# Altium PCB GIC_G1.PcbDoc
Units mm, origin at the board's own origin, x right, y up, seen from the top; angles counter-clockwise.
Board outline 50 x 50 mm, 2 copper layers (Top Layer, Bottom Layer); 17 components, 10 nets, 46 pads, 0 vias.
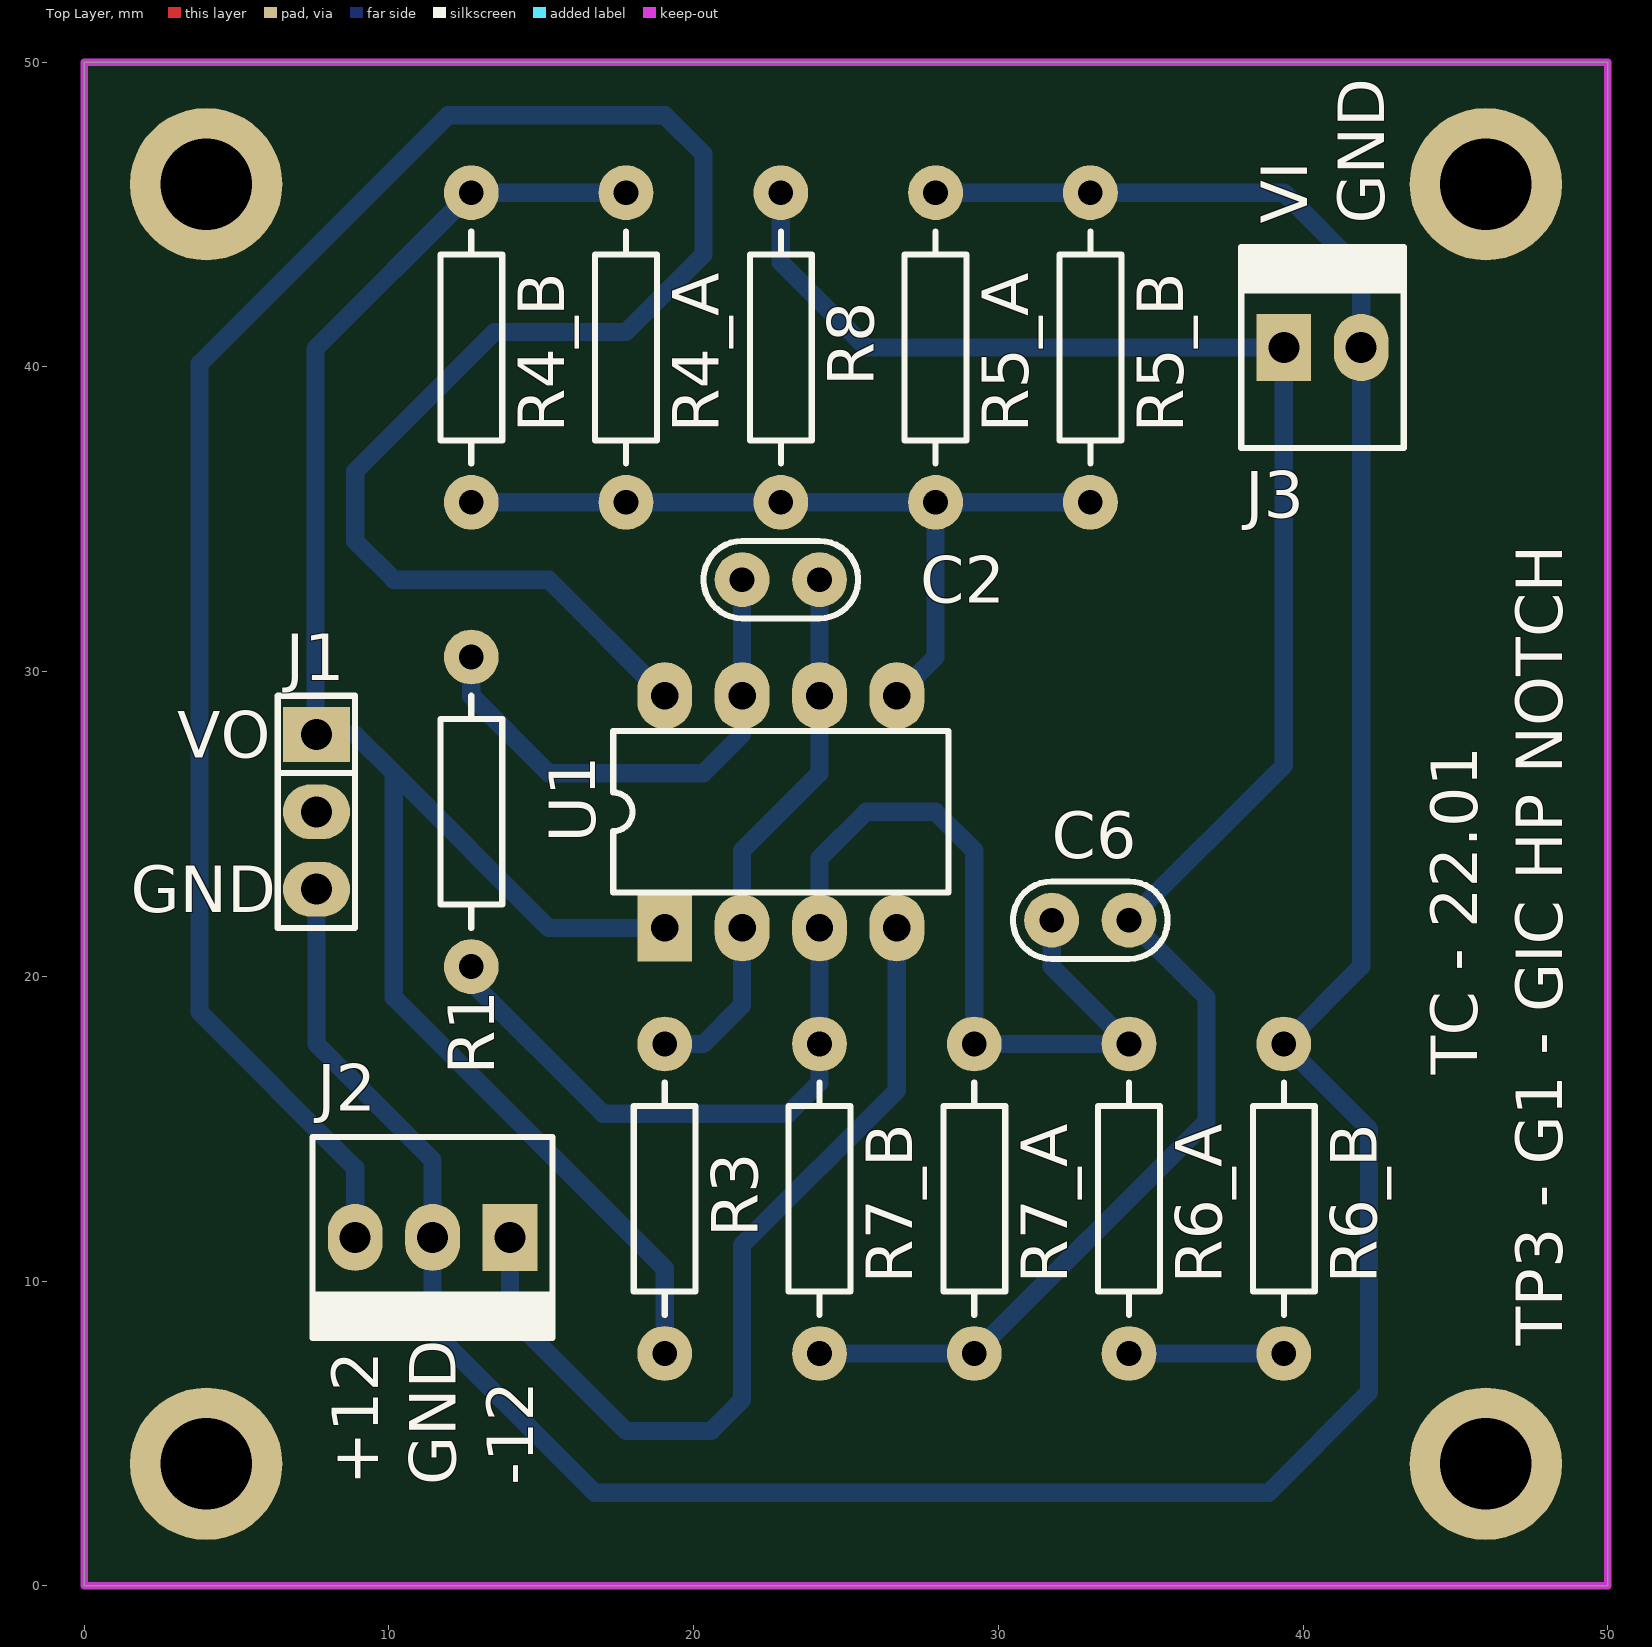
[diagram p0: Top Layer view]
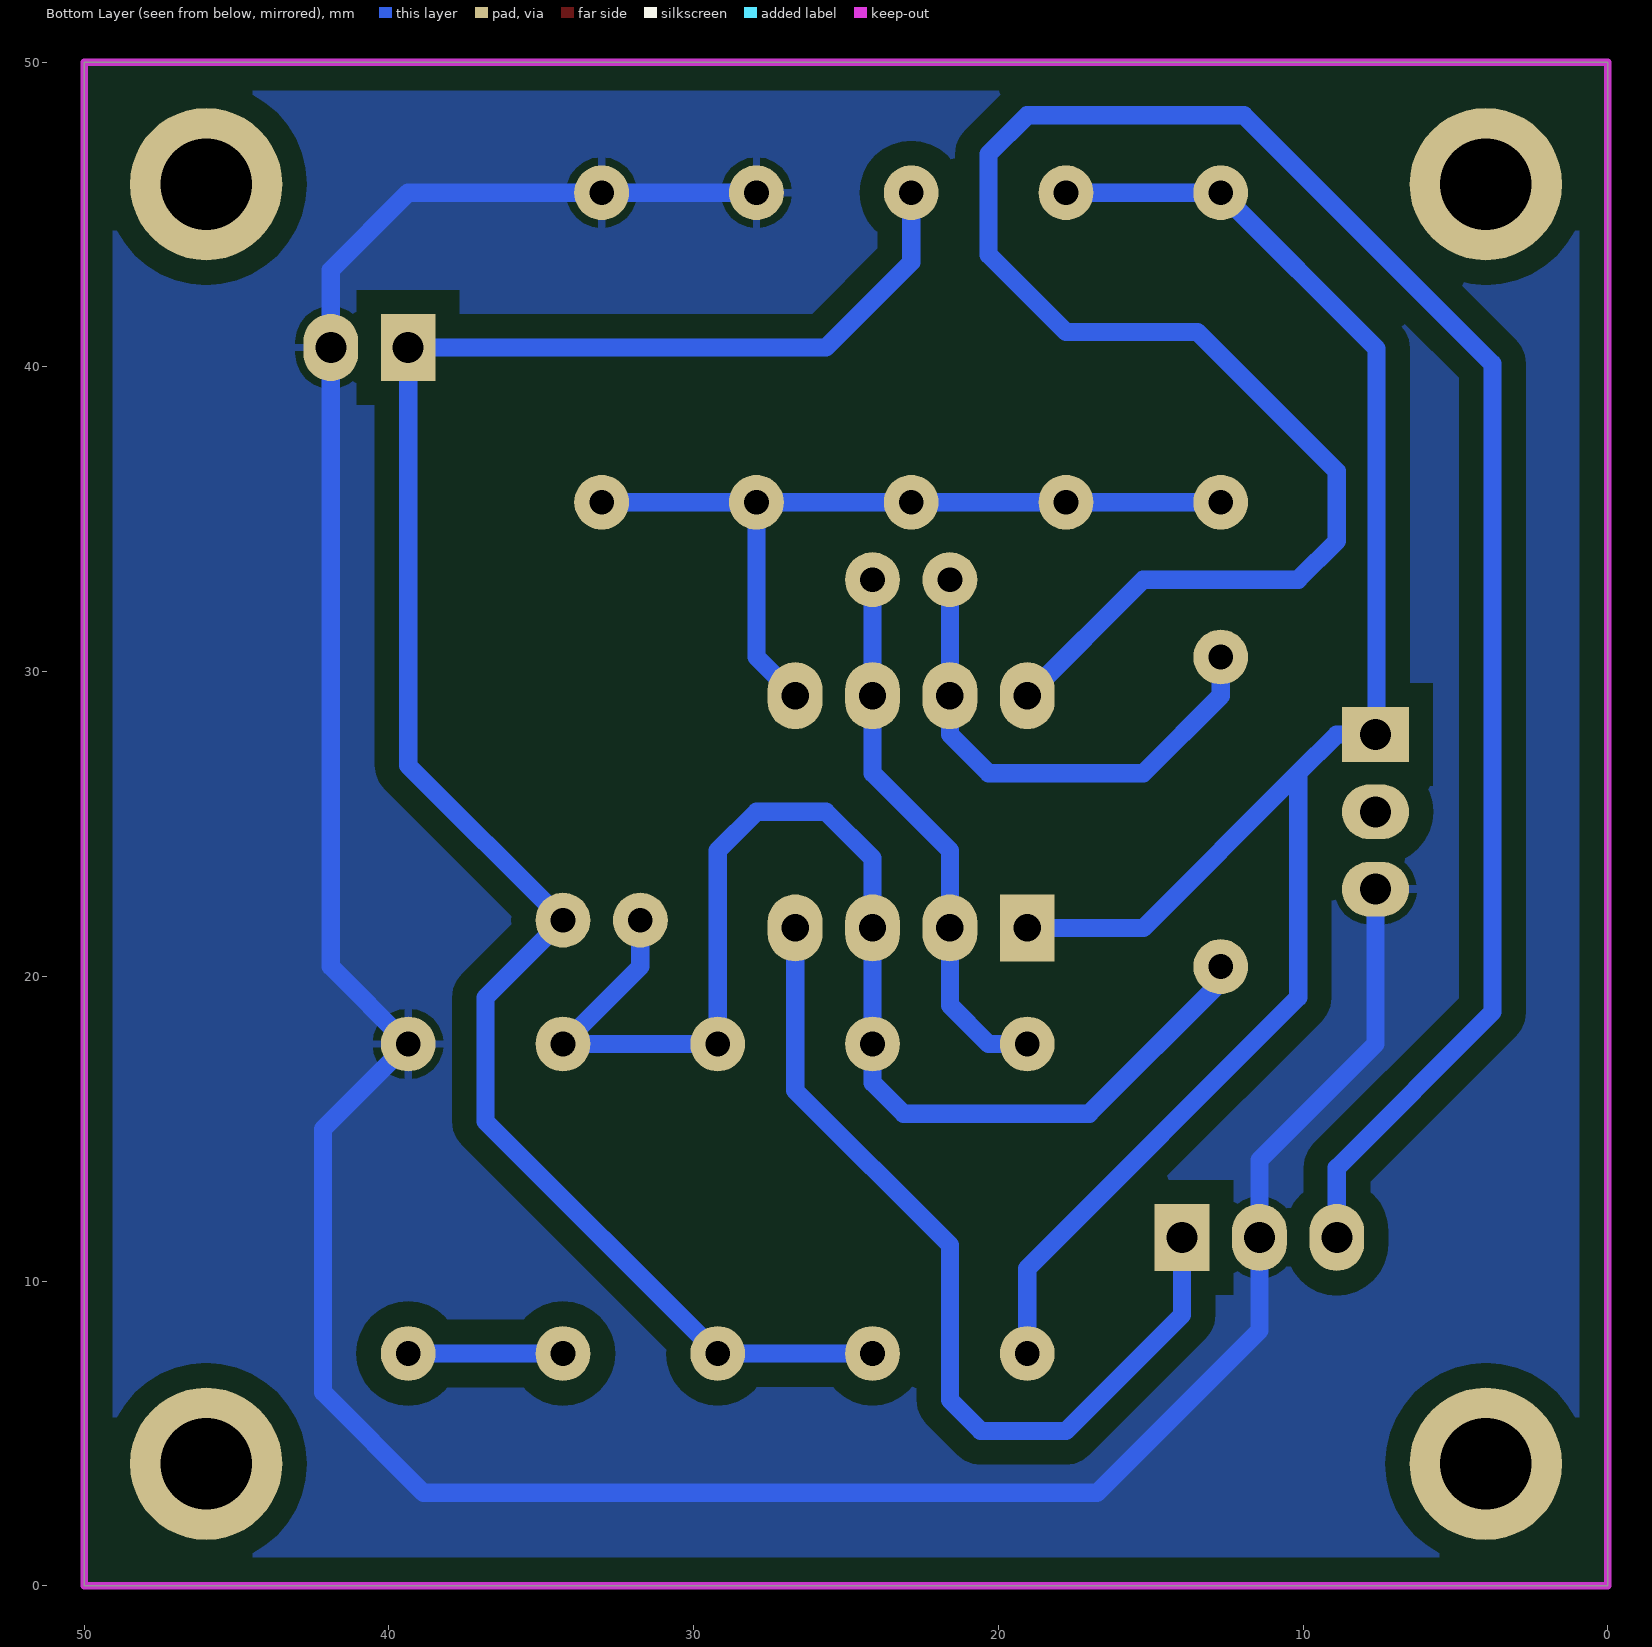
[diagram p1: Bottom Layer view, seen from below]
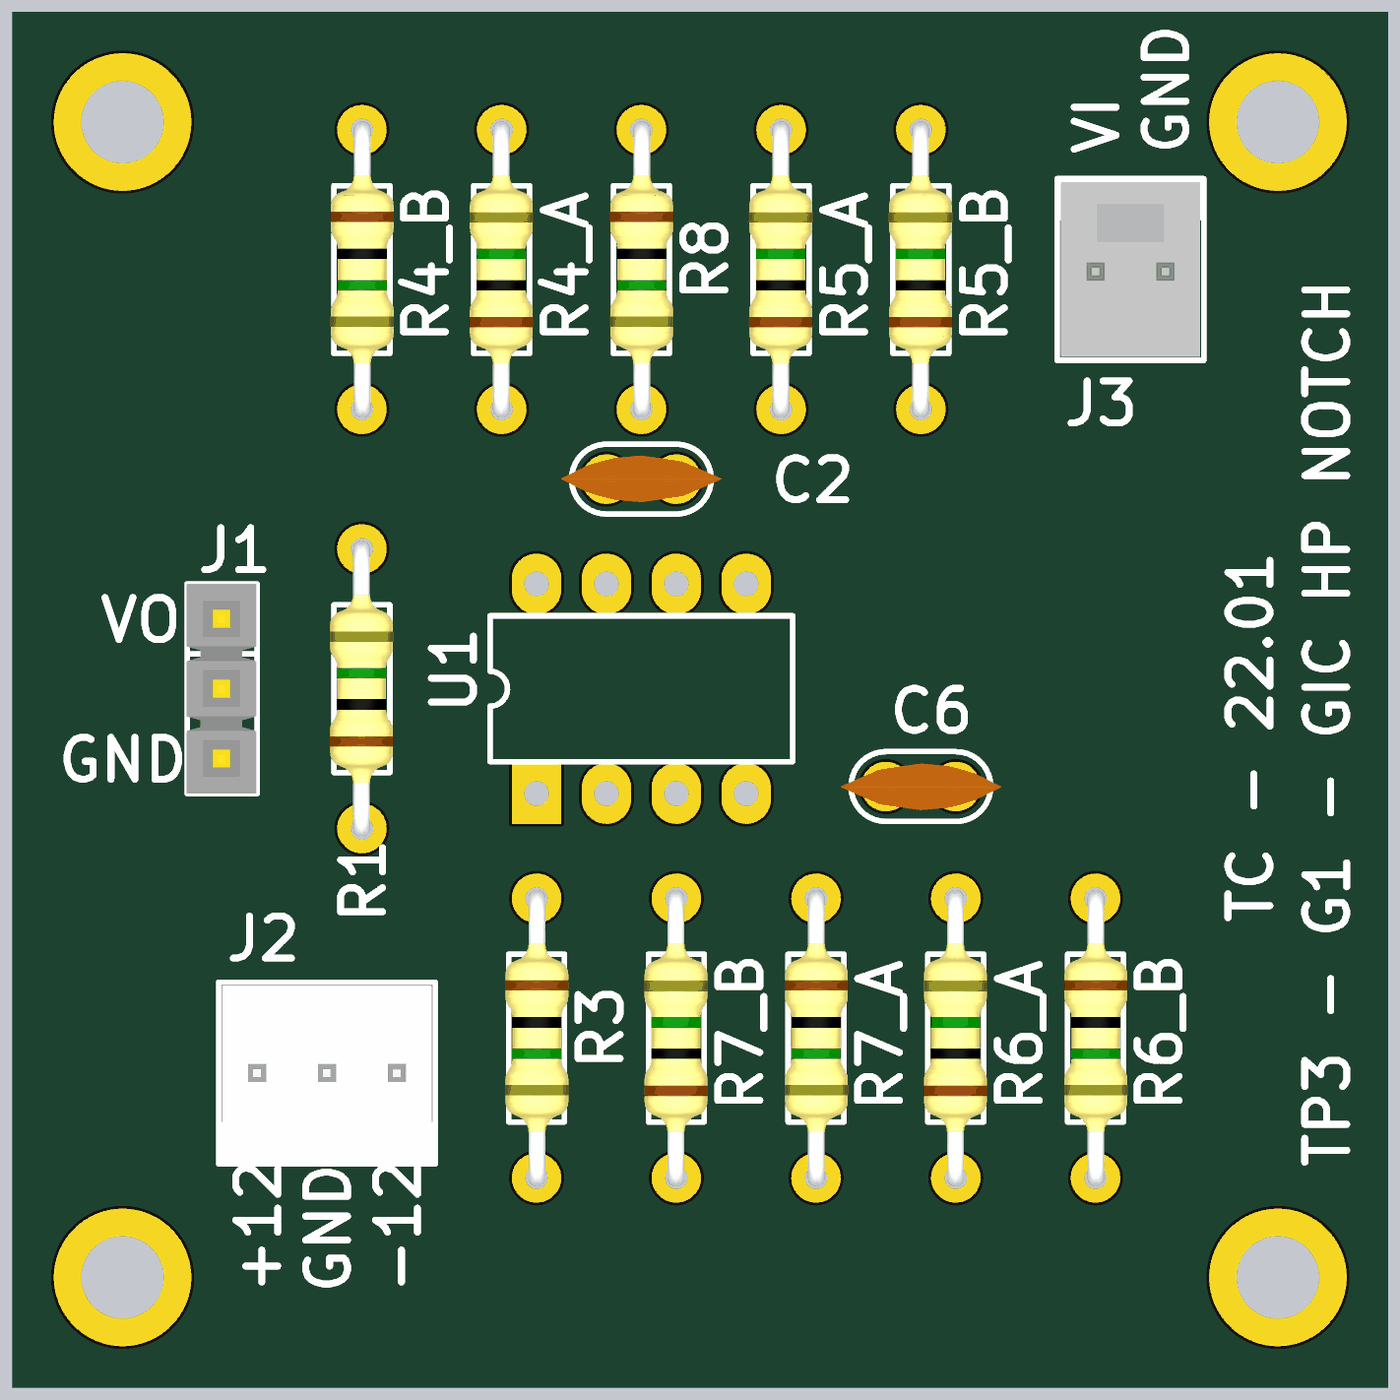
[diagram p2: 3D render of the assembled board from above, using the file's embedded part models]

## Layer stack, top to bottom
Top Solder: solder mask 0.0102, Solder Resist, Dk 3.5
Top Layer: signal copper 0.0356
Dielectric 1: dielectric 0.32, FR-4, Dk 4.8
Bottom Layer: signal copper 0.0356
Bottom Solder: solder mask 0.0102, Solder Resist, Dk 3.5

## Board outline
0,0 0,50 50,50 50,0

## Design rules (kind name [scope] priority, off if disabled: settings)
Clearance [All] p1: gap=0.7
PolygonConnect [All] p1: connectstyle=Relief reliefconductorwidth=0.254 reliefentries=4 polygonreliefangle="90 Angle" airgapwidth=0.254
RoutingVias [All] p1: holewidth=0.711 width=1.27 viastyle="Through Hole" minholewidth=0.711 minwidth=1.27 maxholewidth=0.711 maxwidth=1.27
SolderMaskExpansion [All] p1: expansion=0.102
Width [All] p1: maxlimit=0.6 minlimit=0.6 preferedwidth=0.6
30 further rules are at their usual default settings.

## Components (designator, comment, footprint, x,y, rotation, side; value= is the part's Value field where it differs from the comment)
C2 "10nF" CAP100 22.86,33.02 r0 top
C6 "10nF" CAP100 33.02,21.844 r180 top
J1 "OUT" SIP3 7.62,25.4 r270 top
J2 "FUENTE" MOLEX3 13.97,11.43 r180 top
J3 "V_IN" MOLEX2 39.37,40.64 r0 top
R1 "7K5" RES400 12.7,20.32 r90 top
R3 "7K5" RES400 19.05,17.78 r270 top
R4_A "3K3" RES400 17.78,35.56 r90 top
R4_B "56K" RES400 12.7,45.72 r270 top
R5_A "5K6" RES400 27.94,35.56 r90 top
R5_B "100K" RES400 33.02,35.56 r90 top
R6_A "18K" RES400 34.29,7.62 r90 top
R6_B "1K" RES400 39.37,17.78 r270 top
R7_A "120K" RES400 29.21,17.78 r270 top
R7_B "180K" RES400 24.13,7.62 r90 top
R8 "7K5" RES400 22.86,45.72 r270 top
U1 "LM833N" DIP8 22.86,25.4 r0 top

## Footprints (in the part's own frame and the unit in brackets; to place one, negate y for a bottom-side part, rotate by r counter-clockwise, add the part's x,y. Pads: shape width x height; smd on the part's side, far side on the other; paste and mask are expansions set on the pad)
CAP100 [mm]
  round 1.8 hole 0.813: 1(-1.27,0) 2(1.27,0)
  silkscreen extent -2.54,-1.27 2.54,1.27, body extent -2.92,-0.84 2.92,0.86, height 6.12
DIP8 [mm] "DIP; 8 Leads; Row Spacing 7.62 mm; Pitch 2.54 mm"
  rect 1.8x2.2 hole 0.9: 1(-3.81,-3.81)
  oval 1.8x2.2 hole 0.9: 2(-1.27,-3.81) 3(1.27,-3.81) 4(3.81,-3.81) 5(3.81,3.81) 6(1.27,3.81) 7(-1.27,3.81) 8(-3.81,3.81)
  silkscreen extent -5.5,-2.65 5.5,2.65
MOLEX2 [mm]
  rect 1.8x2.2 hole 1.016: 1(0,0)
  oval 1.8x2.2 hole 1.016: 2(2.54,0)
  silkscreen extent -1.4,-3.3 3.94,3.3, body extent -1.27,-3.17 3.81,3.17, height 10.74
MOLEX3 [mm]
  rect 1.8x2.2 hole 1.016: 1(0,0)
  oval 1.8x2.2 hole 1.016: 2(2.54,0) 3(5.08,0)
  silkscreen extent -1.4,-3.3 6.48,3.3, body extent -1.27,-3.17 6.35,3.18, height 10.74
RES400 [mm]
  round 1.8 hole 0.813: 1(0,0) 2(10.16,0)
  silkscreen extent 1.27,-1.02 8.89,1.02, body extent -0.3,-1.14 10.46,1.17, height 2.43
SIP3 [mm]
  rect 1.8x2.2 hole 1.016: 1(-2.54,0)
  oval 1.8x2.2 hole 1.016: 2(0,0) 3(2.54,0)
  silkscreen extent -3.81,-1.27 3.81,1.27, body extent -3.81,-1.3 3.81,1.24, height 8.38

## Part data
C2 C6: library part CAP
J1: library part CON3
J2: library part MOLEX3
J3: library part MOLEX2
R1 R3 R4_A R4_B R5_A R5_B R6_A R6_B R7_A R7_B R8: library part RES
U1: "Low-Noise Dual Operational Amplifier"

## Free pads (board coordinates)
  round 5 hole 3: 0(4,4) 1(4,46) 2(46,4) 3(46,46)

## Nets (pads, with @x,y where several pads share a name; then routed paths per layer and width w, separated by ;. In a path a pad name is that pad's centre, name@x,y a point inside that pad or via, vN(x,y) a via of type N, cw(c..) or ccw(c..) an arc to the next point about the centre after c; other vN are vias at no path point)
+12: J2.3 U1.8 | length 83.5
  Bottom Layer w0.6: J2.3 8.89,13.716 3.78,18.826 3.78,40.102 11.938,48.26 19.05,48.26 20.32,46.99 20.32,43.688 17.78,41.148 13.462,41.148 8.89,36.576 8.89,34.29 10.16,33.02 15.24,33.02 U1.8
-12: J2.1 U1.4 | length 29.8
  Bottom Layer w0.6: J2.1 13.97,8.89 17.78,5.08 20.574,5.08 21.59,6.096 21.59,11.176 26.67,16.256 U1.4
GND: J1.3 J2.2 J3.2 R5_A.2 R5_B.2 R6_B.1 | length 104.4
  Bottom Layer w0.6: J1.3 7.62,17.78 11.43,13.97 J2.2 11.43,8.382 16.764,3.048 38.862,3.048 42.164,6.35 42.164,14.986 R6_B.1 41.91,20.32 J3.2 41.91,43.18 39.37,45.72 R5_B.2 R5_A.2
NetC2_1: C2.1 R1.2 U1.7 | length 16.8
  Bottom Layer w0.6: R1.2 12.7,29.21 15.24,26.67 20.32,26.67 21.59,27.94 U1.7 C2.1
NetC2_2: C2.2 R3.1 U1.2 U1.6 | length 18.1
  Bottom Layer w0.6: R3.1 20.32,17.78 21.59,19.05 U1.2 21.59,24.13 24.13,26.67 U1.6 C2.2
NetC6_1: C6.1 J3.1 R7_A.2 R7_B.1 R8.1 | length 64.4
  Bottom Layer w0.6: R8.1 22.86,43.434 25.654,40.64 J3.1 39.37,26.924 C6.1 36.83,19.304 36.83,15.24 R7_A.2 R7_B.1
NetC6_2: C6.2 R1.1 R6_A.2 R7_A.1 R7_B.2 U1.3 | length 44.3
  Bottom Layer w0.6: R1.1 12.7,19.812 17.018,15.494 23.114,15.494 24.13,16.51 R7_B.2 U1.3 24.13,23.876 25.654,25.4 27.94,25.4 29.21,24.13 R7_A.1 R6_A.2 31.75,20.32 C6.2
NetJ1_1: J1.1 R3.2 R4_A.2 R4_B.1 U1.1 | length 61.8
  Bottom Layer w0.6: R4_A.2 R4_B.1 7.59,40.61 7.59,27.94 J1.1 8.89,27.94 10.16,26.67 ; R3.2 19.05,10.414 10.16,19.304 10.16,26.67 ; U1.1 15.24,21.59 10.16,26.67
NetR4_A_1: R4_A.1 R4_B.2 R5_A.1 R5_B.1 R8.2 U1.5 | length 27.2
  Bottom Layer w0.6: R4_B.2 R4_A.1 R8.2 R5_A.1 ; U1.5 27.94,30.48 R5_A.1 ; R5_B.1 R5_A.1
NetR6_A_1: R6_A.1 R6_B.2 | length 5.1
  Bottom Layer w0.6: R6_A.1 R6_B.2
pads on no net: J1.2

## Polygon pours and split planes (outlines as drawn)
GND on Bottom Layer "Top Overlay-No Net" (solid, remove dead copper, pour order 3): 0,50 50,50 50,0 0,0

## Keep-outs
Keep-Out Layer:
  the board outline again, w0.254

## Silkscreen, mask and mechanical layers (free items; w line width, h text height)
Top Overlay:
  text "VI" at 40.132,44.704 h1.52 r90
  text "GND" at 42.672,44.704 h1.52 r90
  text "VO" at 3.048,27.178 h1.52
  text "GND" at 1.524,22.098 h1.52
  text "TC - 22.01" at 45.72,16.764 h1.52 r90
  text "TP3 - G1 - GIC HP NOTCH" at 48.514,7.874 h1.52 r90
  text "+12" at 9.652,3.302 h1.52 r90
  text "GND" at 12.192,3.302 h1.52 r90
  text "-12" at 14.732,3.302 h1.52 r90